# Altium PCB COMP.PcbDoc
Units mm, origin at the board's own origin, x right, y up, seen from the top; angles counter-clockwise.
Board outline 50 x 50 mm, 2 copper layers (Top Layer, Bottom Layer); 8 components, 6 nets, 24 pads, 2 vias.
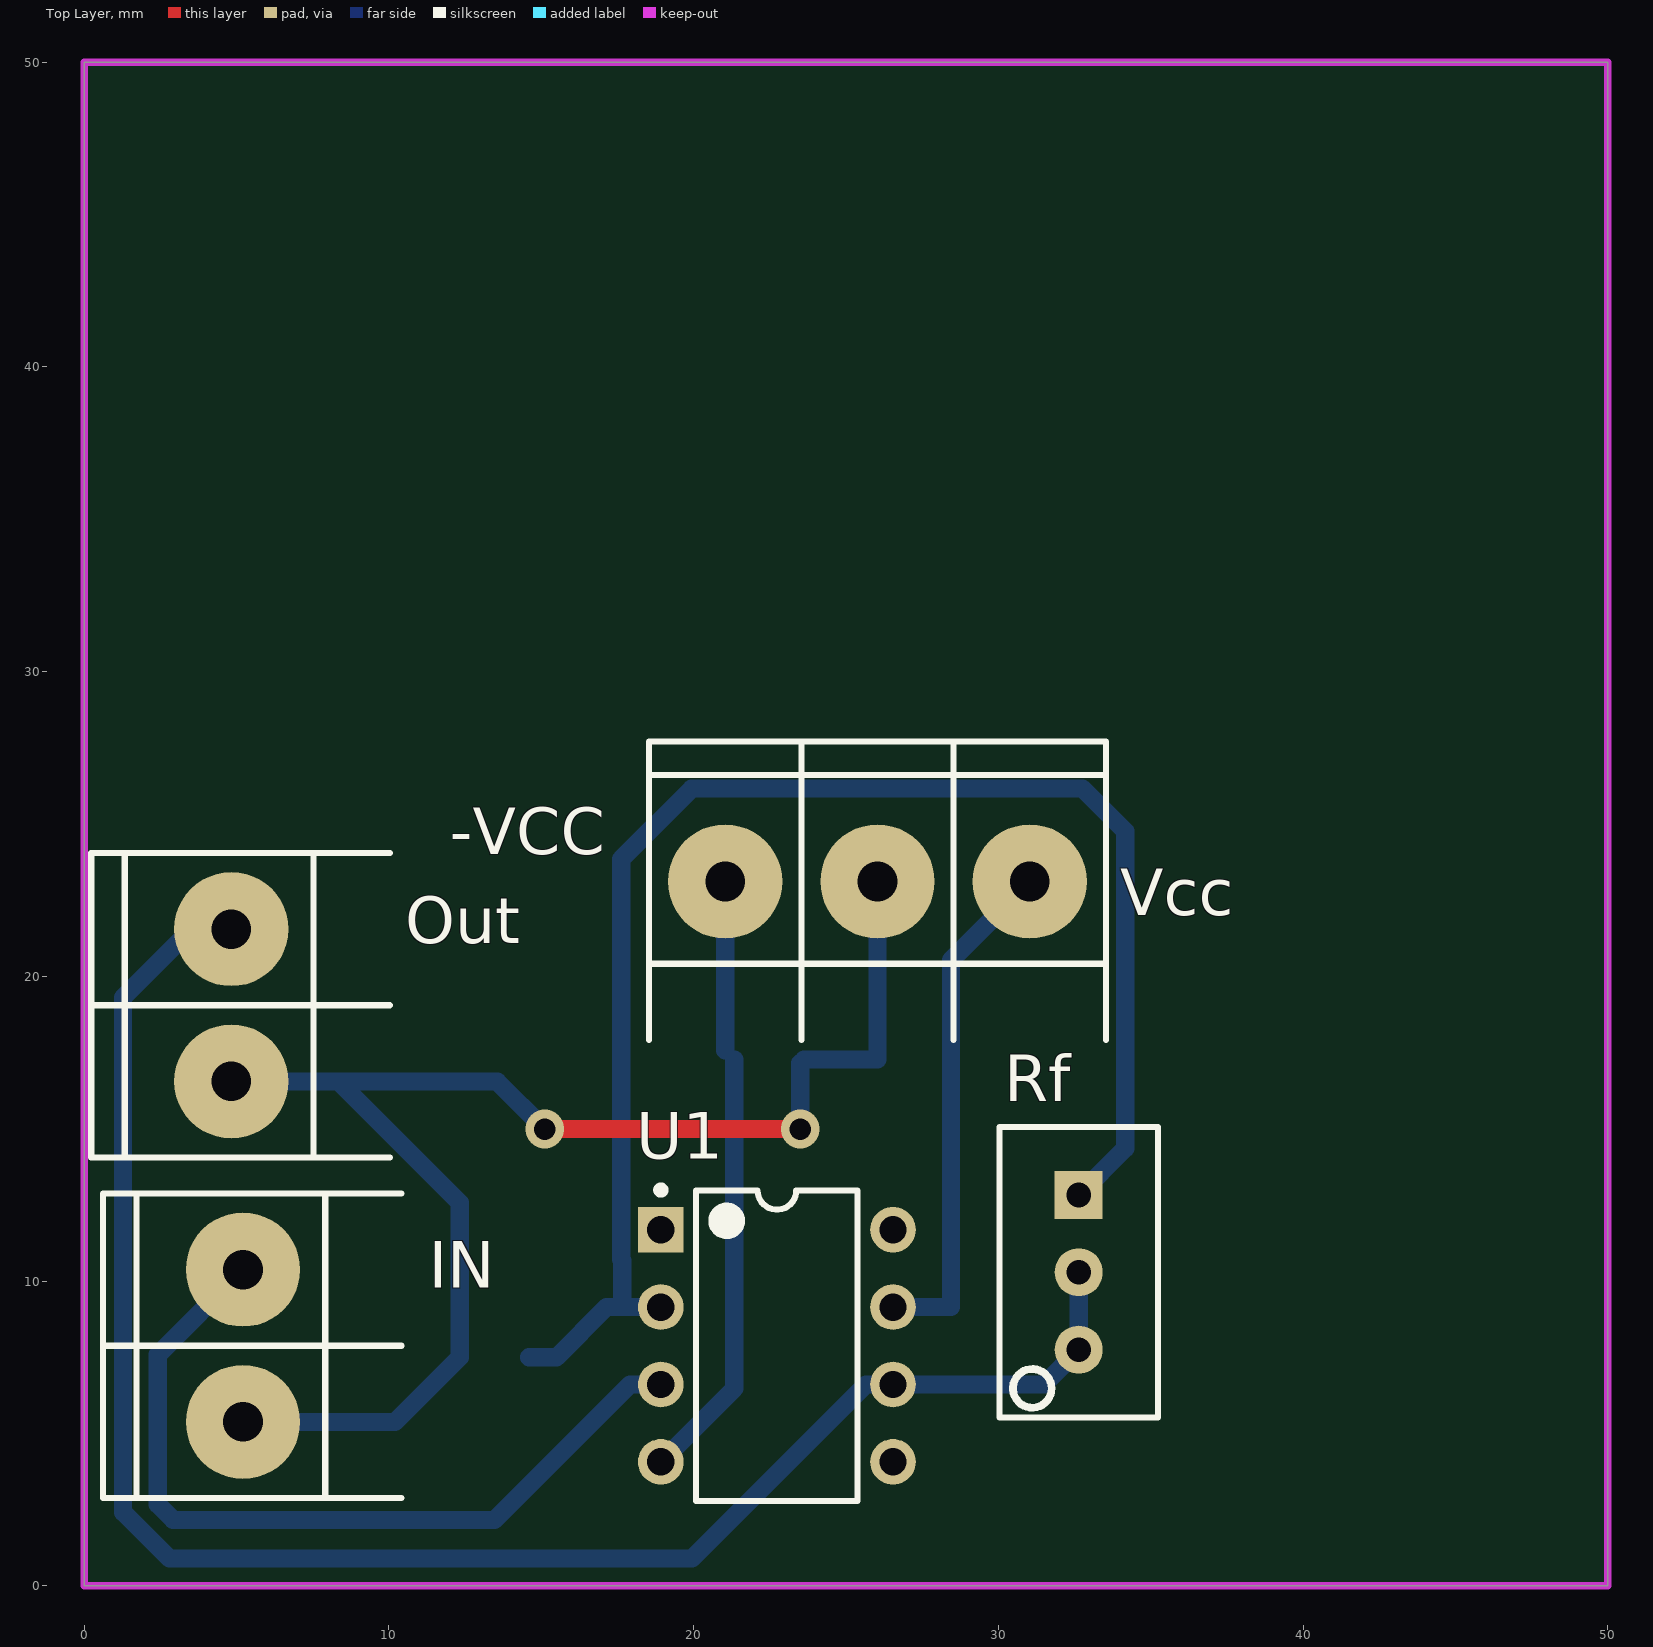
[diagram p0: Top Layer view]
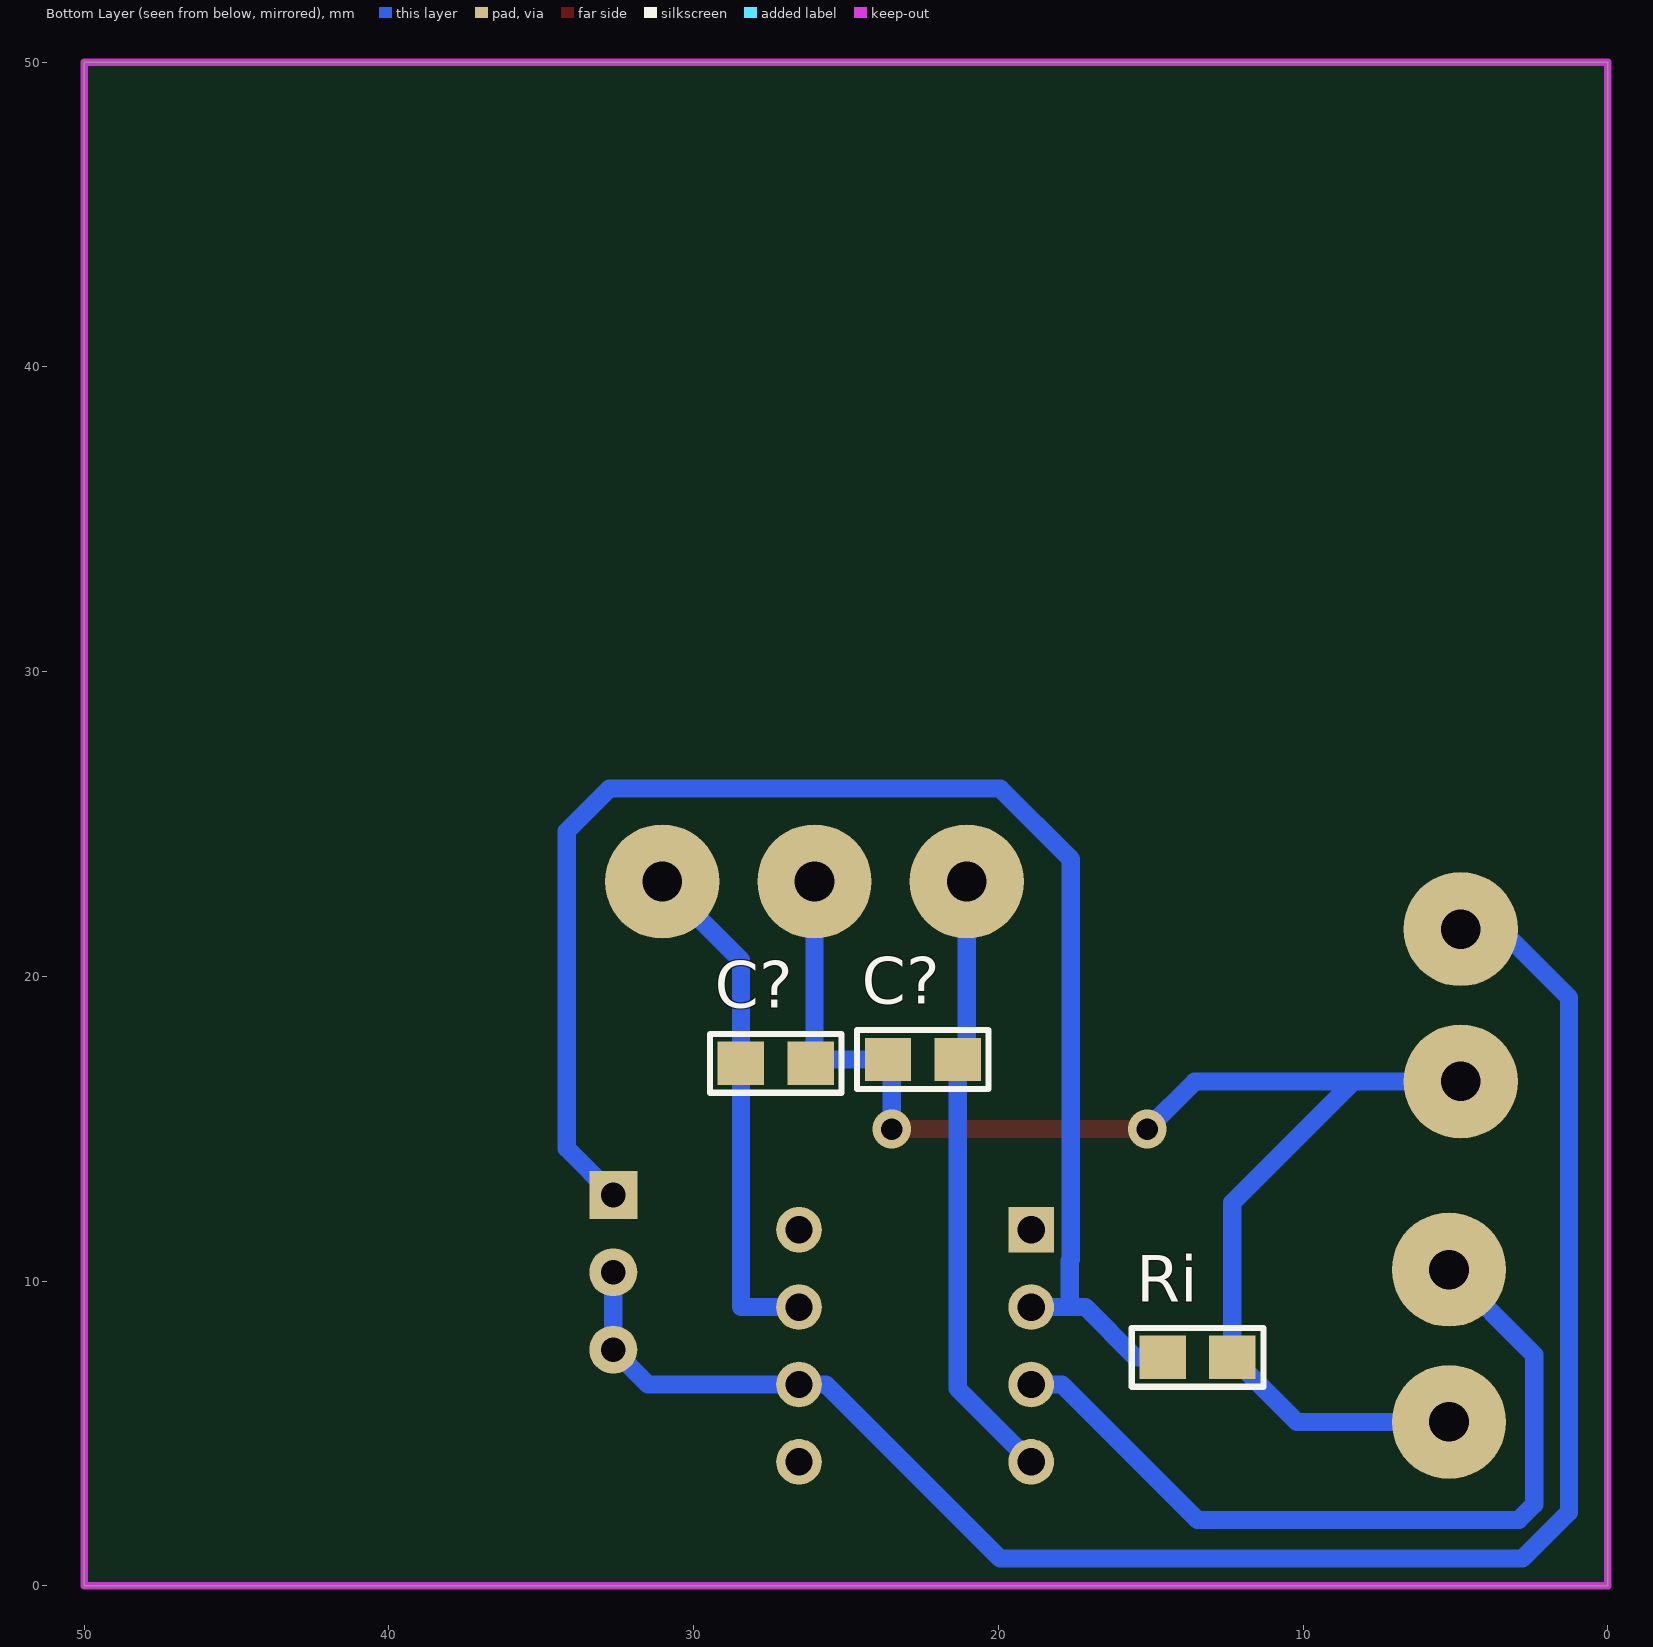
[diagram p1: Bottom Layer view, seen from below]
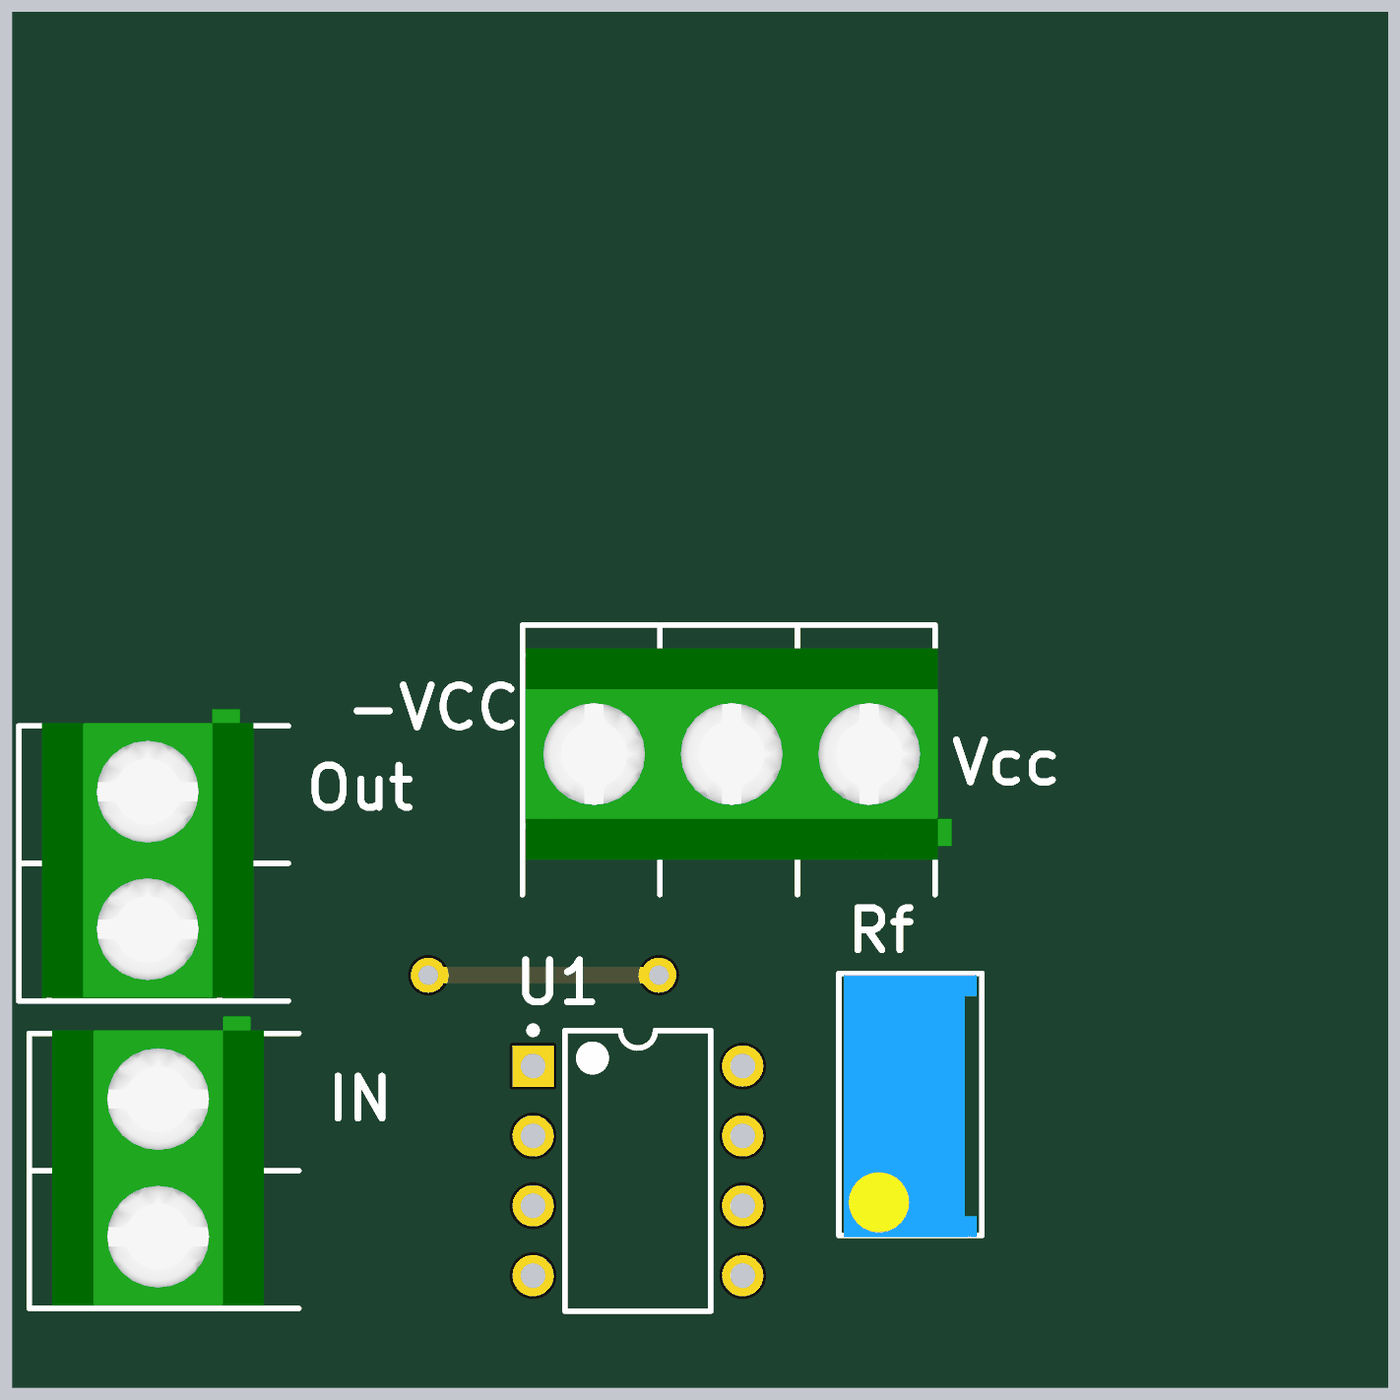
[diagram p2: 3D render of the assembled board from above, using the file's embedded part models]
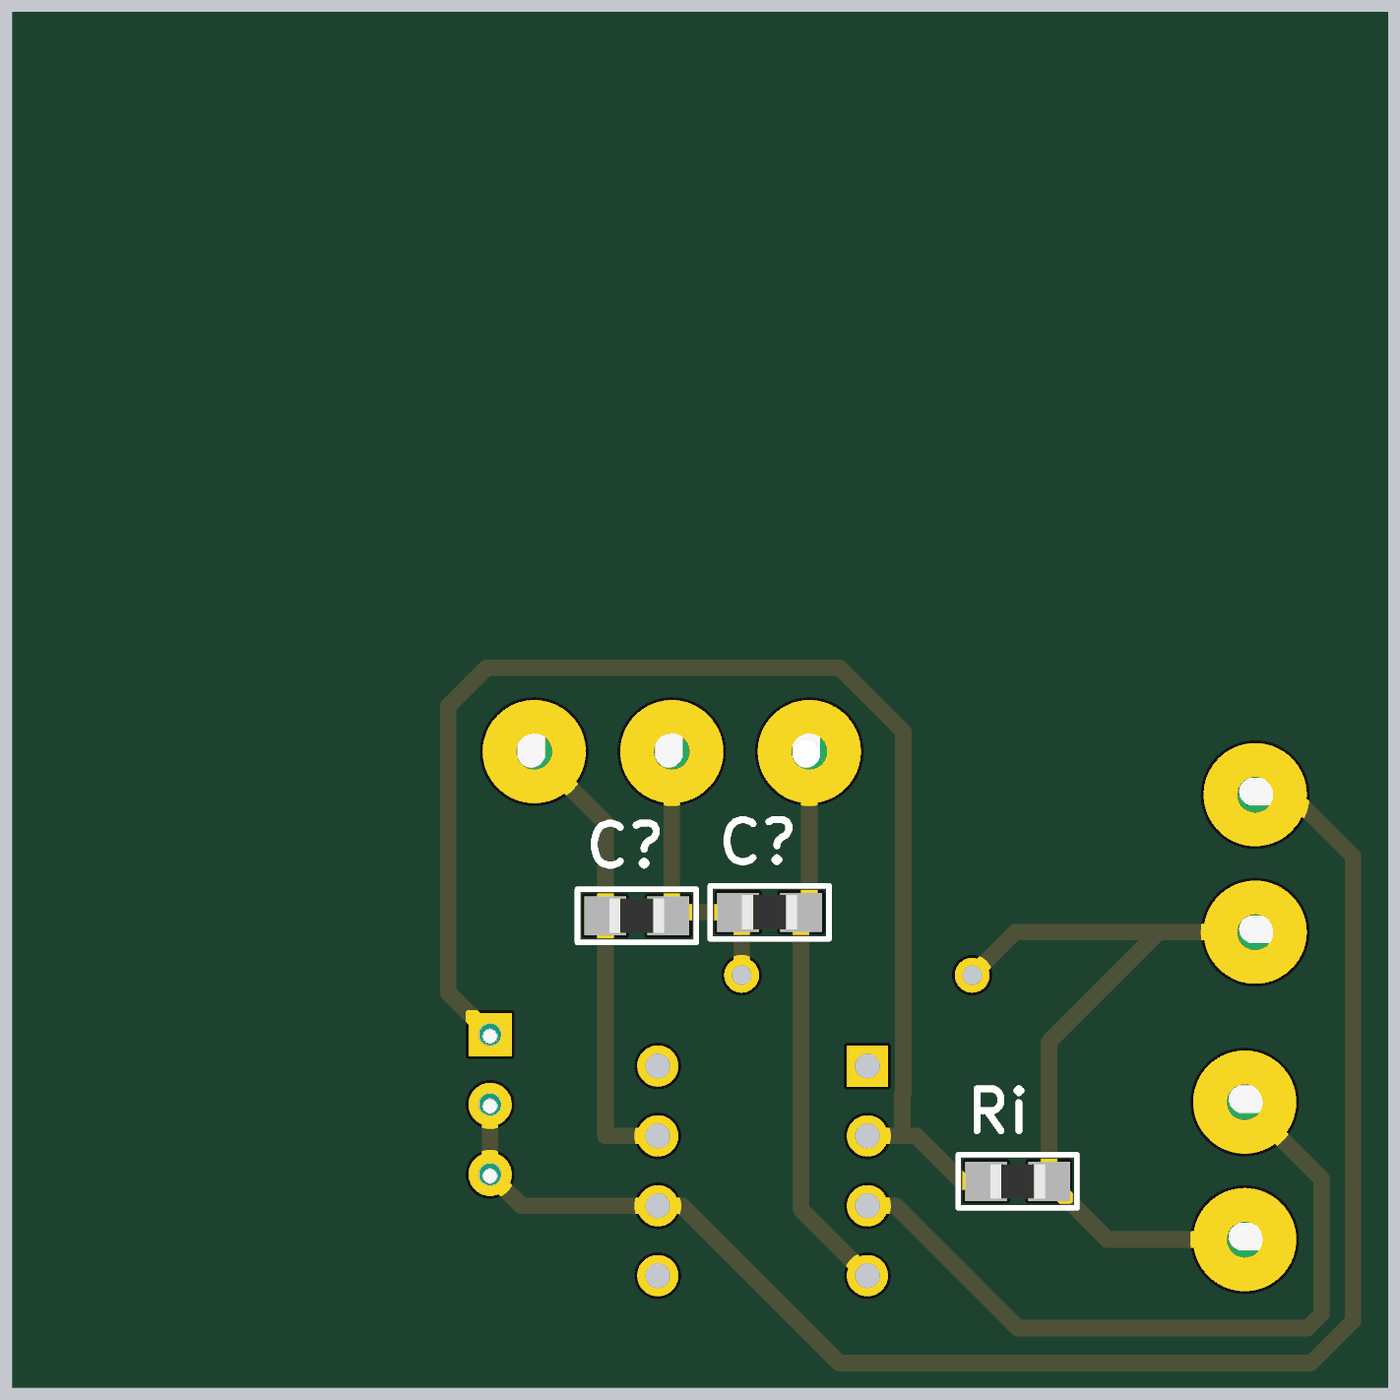
[diagram p3: 3D render of the assembled board from below, using the file's embedded part models]

## Layer stack, top to bottom
Top Solder: solder mask 0.0102, Solder Resist, Dk 3.5
Top Layer: signal copper 0.0356
Dielectric 1: dielectric 0.32, FR-4, Dk 4.8
Bottom Layer: signal copper 0.0356
Bottom Solder: solder mask 0.0102, Solder Resist, Dk 3.5

## Board outline
0,0 0,50 50,50 50,0

## Design rules (kind name [scope] priority, off if disabled: settings)
Clearance [All] p1: gap=0.254
PolygonConnect [All] p1: connectstyle=Relief reliefconductorwidth=0.254 reliefentries=4 polygonreliefangle="90 Angle" airgapwidth=0.254
RoutingVias [All] p1: holewidth=0.711 width=1.27 viastyle="Through Hole" minholewidth=0.711 minwidth=1.27 maxholewidth=0.711 maxwidth=1.27
SolderMaskExpansion [All] p1: expansion=0.102
Width [All] p1: maxlimit=0.6 minlimit=0.6 preferedwidth=0.6
30 further rules are at their usual default settings.

## Classes and differential pairs
component class COMP: C? IN Out Rf Ri U1 Vcc

## Components (designator, comment, footprint, x,y, rotation, side; value= is the part's Value field where it differs from the comment)
C? "CAP" 0805 22.479,17.272 r180 bottom
C? "CAP" 0805 27.305,17.145 r180 bottom
IN "BORNERA 2" BORNERA2 5.207,7.874 r0 top
Out "BORNERA 2" BORNERA2 4.826,19.05 r0 top
Rf "PRESET" "PRESET V" 32.639,10.287 r270 top
Ri "RES" 0805 13.462,7.493 r0 bottom
U1 "TL081ACP" TI-P8 22.733,7.874 r0 top
Vcc "BORNERA 3" BORNERA3 26.035,23.114 r270 top

## Footprints (in the part's own frame and the unit in brackets; to place one, negate y for a bottom-side part, rotate by r counter-clockwise, add the part's x,y. Pads: shape width x height; smd on the part's side, far side on the other; paste and mask are expansions set on the pad)
0805 [mil] "Pasivo 0805"
  rect 60x56 smd: 1(-45,0) 2(45,0)
  silkscreen extent -85,-38 85,38, body extent -39,-25 39,25, height 15
BORNERA2 [mm] "Bornera con Tornillos 5mm separación"
  round 3.75 hole 1.3: 1(0,2.5) 2(0,-2.5)
  silkscreen extent -4.6,-5 5.2,5, body extent -3.76,-4.89 3.94,5.61, height 10
BORNERA3 [mm] "Bornera con Tornillos 5mm separación"
  round 3.75 hole 1.3: 1(0,5) 2(0,0) 3(0,-5)
  silkscreen extent -4.6,-7.5 5.2,7.5, body extent -3.76,-7.39 3.94,8.11, height 10.05
"PRESET V" [mil]
  rect 62x62 hole 32: 1(-100,0)
  round 62 hole 32: 2(0,0) 3(100,0)
  silkscreen extent -188,-102 188,102, body extent -185,-95 190,95, height 455
TI-P8 [mm] "DIP, 8-Leads, Body 9.59x6.35mm, Pitch 2.54mm"
  rect 1.5x1.5 hole 0.9: 1(-3.81,3.81)
  round 1.5 hole 0.9: 2(-3.81,1.27) 3(-3.81,-1.27) 4(-3.81,-3.81) 5(3.81,-3.81) 6(3.81,-1.27) 7(3.81,1.27) 8(3.81,3.81)
  silkscreen extent -3.93,-5.1 2.65,5.23, body extent -3.95,-5.07 3.95,5.07, height 5.08

## Part data
U1: "JFET-Input Operational Amplifier, 7 to 36 V, 0 to 70 degC, 8-pin DIP (P8), Pb-Free (RoHS)"

## Via types
v1: diameter 1.27, hole 0.711, Top Layer to Bottom Layer, 2 vias

## Nets (pads, with @x,y where several pads share a name; then routed paths per layer and width w, separated by ;. In a path a pad name is that pad's centre, name@x,y a point inside that pad or via, vN(x,y) a via of type N, cw(c..) or ccw(c..) an arc to the next point about the centre after c; other vN are vias at no path point)
-VCC: C?.2@21.336,17.272 U1.4 Vcc.3 | length 19.7
  Bottom Layer w0.6: U1.4 21.336,6.477 C?.2@21.336,17.272 ; C?.2@21.035,17.573 Vcc.3
GND: C?.1@23.622,17.272 C?.2@26.162,17.145 IN.2 Out.2 Ri.1 Vcc.2 | length 48.2
  Top Layer w0.6: v1(15.113,14.986) v1@23.241,14.986
  Bottom Layer w0.6: Out.2 8.342,16.55 ; IN.2 10.2,5.374 Ri.1 12.319,12.573 8.342,16.55 ; v1(15.113,14.986) 13.549,16.55 8.342,16.55 ; v1(23.495,14.986) C?.1@23.495,17.145 ; C?.1@23.622,17.272 26.035,17.272 Vcc.2
NetIN_1: IN.1 U1.3 | length 27.4
  Bottom Layer w0.6: IN.1 2.413,7.58 2.413,2.667 2.921,2.159 13.462,2.159 17.907,6.604 U1.3
NetOut_1: Out.1 Rf.2 Rf.3 U1.6 | length 58.8
  Bottom Layer w0.6: Out.1 3.516,21.55 1.27,19.304 1.27,2.413 2.794,0.889 19.939,0.889 25.654,6.604 U1.6 31.496,6.604 Rf.3 Rf.2
NetRf_1: Rf.1 Ri.2 U1.2 | length 50.4
  Bottom Layer w0.6: Ri.2 15.494,7.493 17.145,9.144 17.653,9.144 ; U1.2 17.653,9.144 ; Rf.1 34.163,14.351 34.163,24.765 32.766,26.162 19.939,26.162 17.619,23.842 17.619,10.705 17.653,10.671 17.653,9.144
VCC: C?.1@28.448,17.145 U1.7 Vcc.1 | length 16.9
  Bottom Layer w0.6: U1.7 28.448,9.144 28.448,17.145 28.448,20.527 Vcc.1
pads on no net: U1.1 U1.5 U1.8

## Keep-outs
Keep-Out Layer:
  the board outline again, w0.254

## Silkscreen, mask and mechanical layers (free items; w line width, h text height)
Top Overlay:
  text "-VCC" at 12,24 h1.52